# Altium PCB AutoReverseAVR2.PcbDoc
Units mil, origin at the board's own origin, x right, y up, seen from the top; angles counter-clockwise.
Board outline 6000 x 4000 mil, 2 copper layers (Top Layer, Bottom Layer); 57 components, 56 nets, 191 pads, 39 vias.
Unrouted connection lines stored in the file: 8.
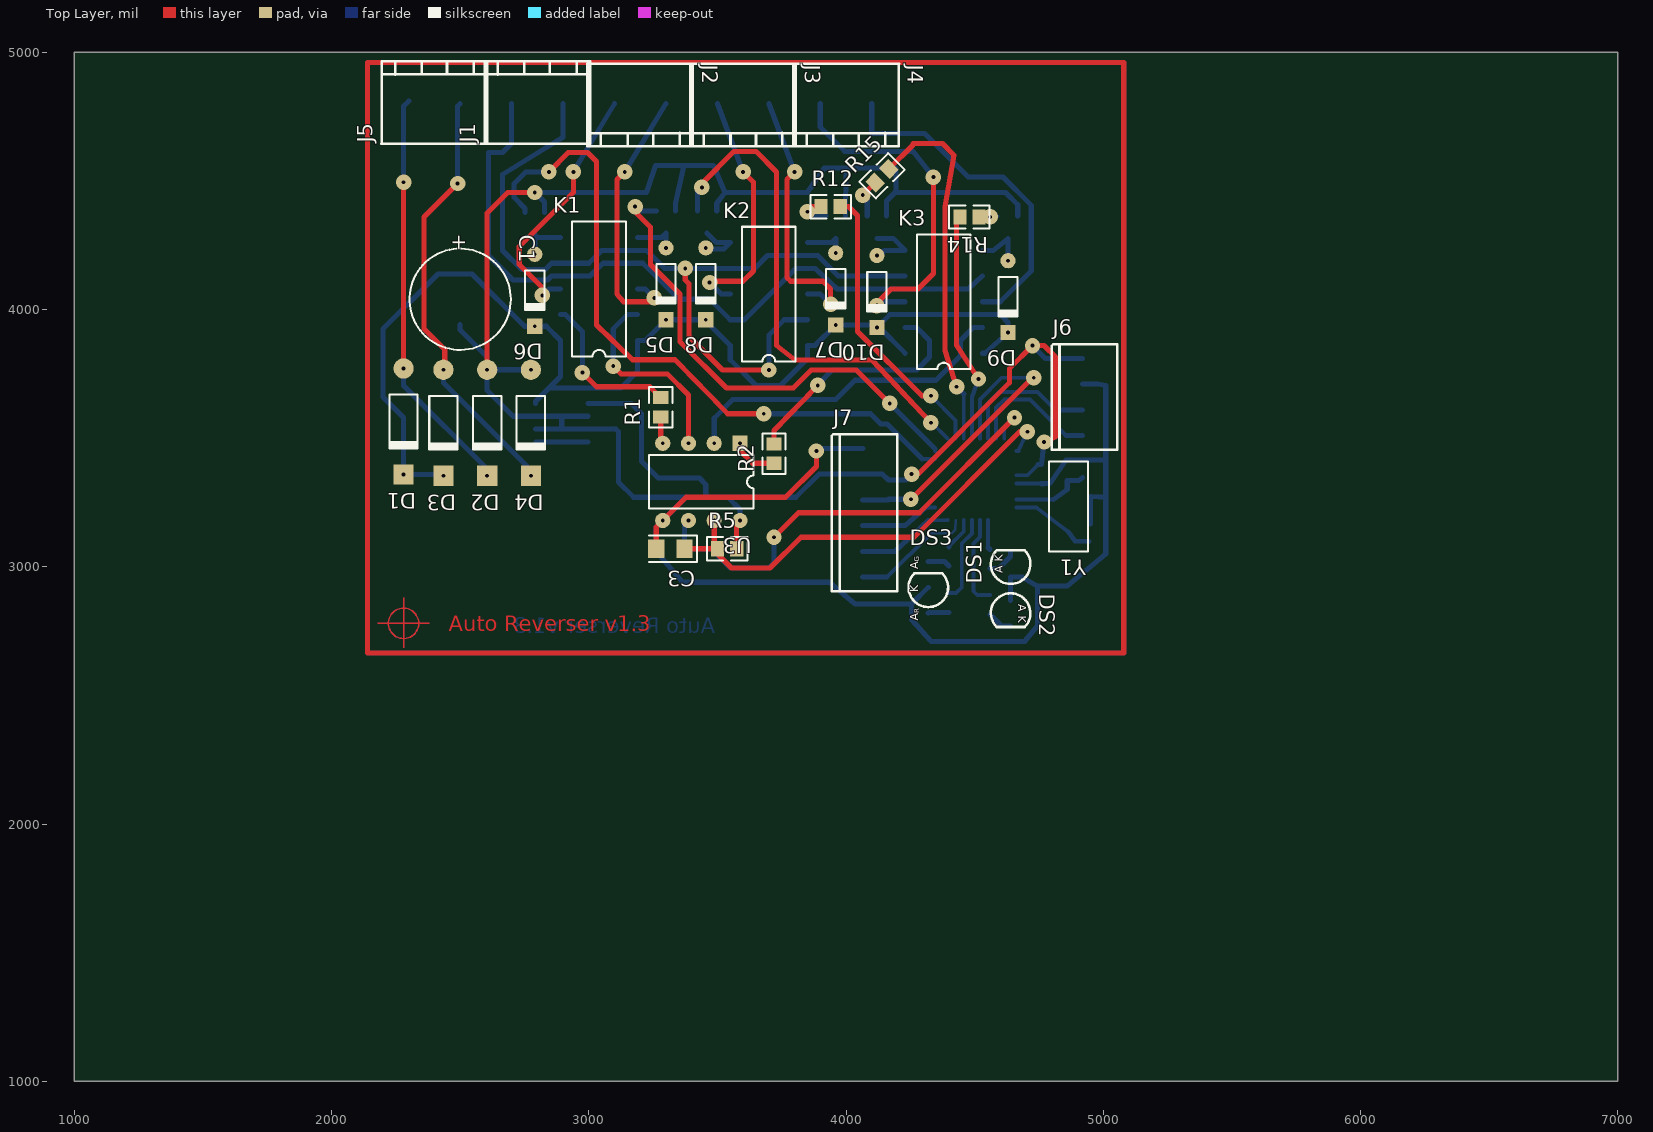
[diagram p0: Top Layer view]
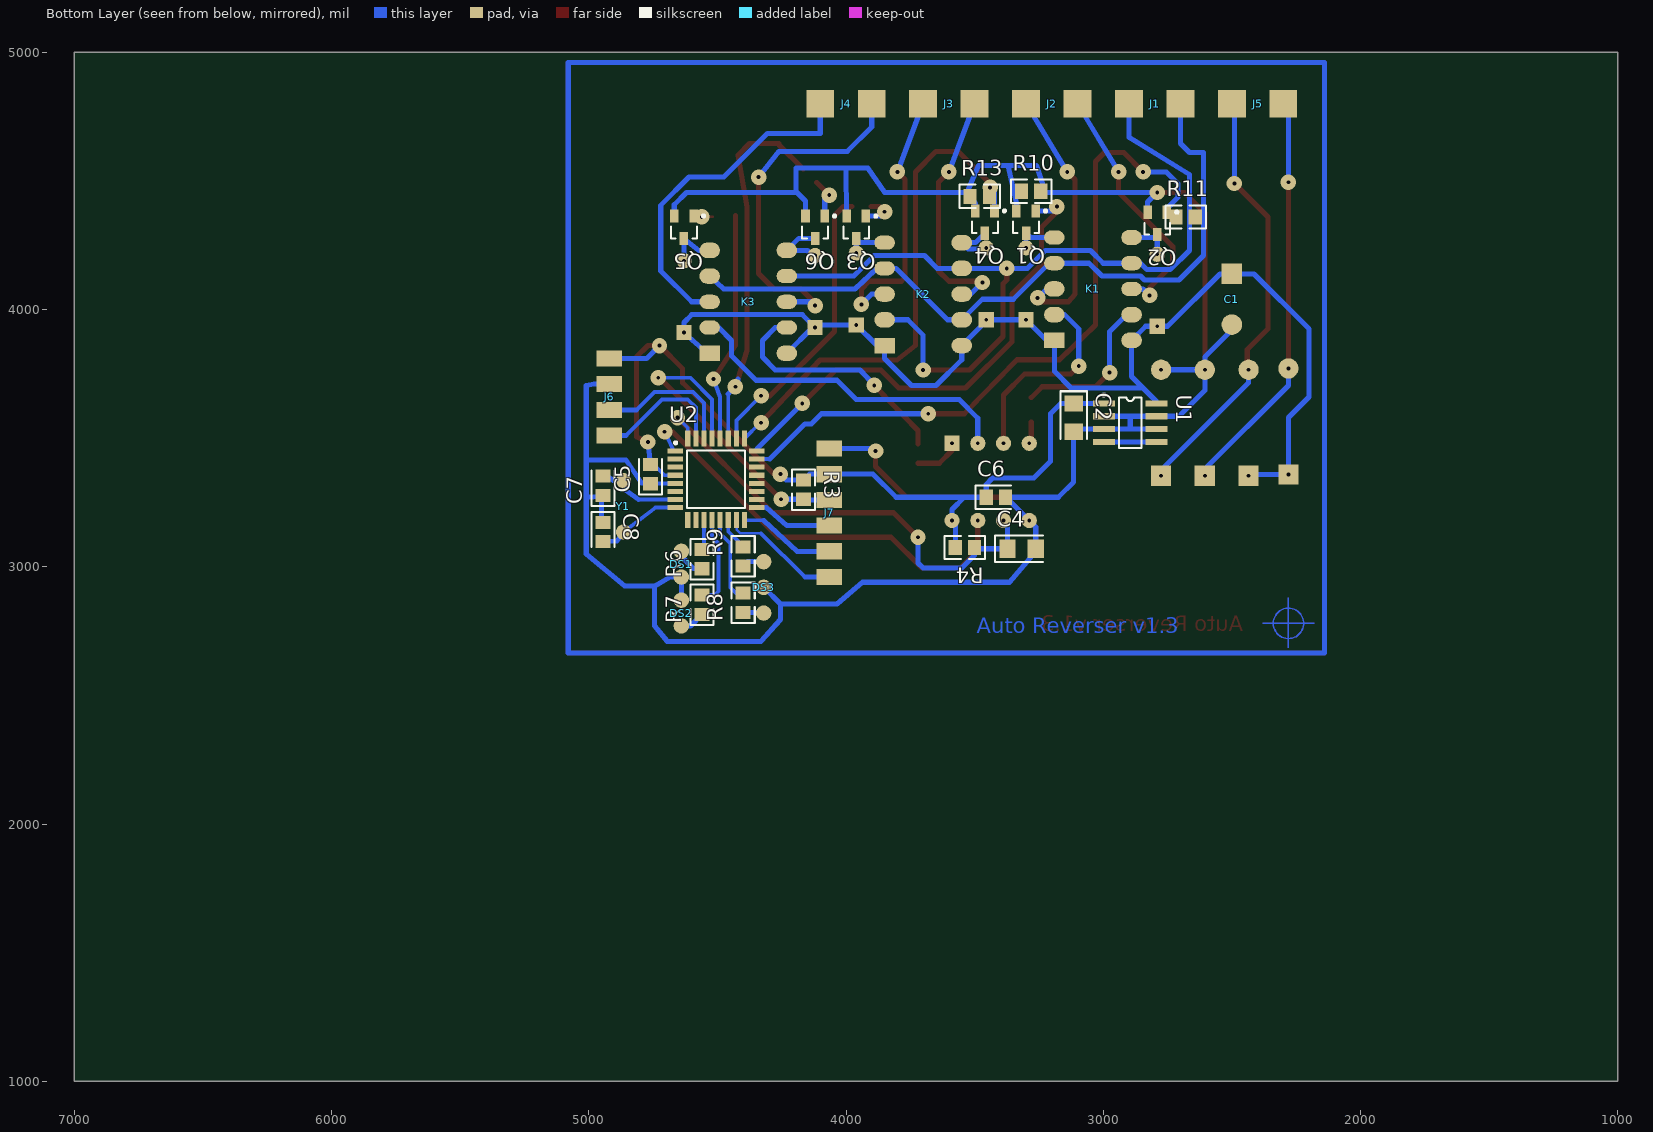
[diagram p1: Bottom Layer view, seen from below]

## Layer stack, top to bottom
Top Layer: signal copper 1.4
Dielectric: dielectric 12.6, FR-4, Dk 4.8
Bottom Layer: signal copper 1.4

## Board outline
1000,1000 7000,1000 7000,5000 1000,5000

## Design rules (kind name [scope] priority, off if disabled: settings)
Clearance [All] p1: gap=12
ComponentClearance [All] p1: gap=10 collisioncheckmode=1
PolygonConnect [All] p1: connectstyle=Relief reliefconductorwidth=10 reliefentries=4 polygonreliefangle="90 Angle"
RoutingLayers [All] p1: top layer=Horizontal bottom layer=Vertical
RoutingVias [All] p1: holewidth=15 width=60 viastyle="Through Hole" minholewidth=15 minwidth=60 maxholewidth=15 maxwidth=60
SolderMaskExpansion [All] p1: expansion=4
TestPointUsage [All] p1: valid=0 allowmultiple=FALSE
Testpoint [All] p1: side=15 testpointundercomponent=TRUE minsize=40 maxsize=100 preferedsize=60 minholesize=0 maxholesize=40 preferedholesize=32 testpointgrid=1 style=1023 order=-539222988
Width [All] p1: maxlimit=50 minlimit=10 preferedwidth=10 toplayer_prefwidth=20 bottomlayer_prefwidth=20 minimp=50.000000 maximp=50.000000 favimp=50.000000
16 further rules are at their usual default settings.

## Components (designator, comment, footprint, x,y, rotation, side; value= is the part's Value field where it differs from the comment)
C1 "Cap Pol1" CAPPR5-10X10.5 2500,4040 r270 top
C2 "10v" CC3216-1206 3115,3580 r270 bottom
C3 "Cap Pol1" CC3216-1206 3317.6,3070 r180 top
C4 "Cap Pol1" CC3216-1206 3317.6,3070 r180 bottom
C5 "Cap" CC2012-0805 4760,3360 r90 bottom
C6 "Cap" CC2012-0805 3417.6,3270 r180 bottom
C7 "Cap" CC2012-0805 4945,3315 r90 bottom
C8 "Cap" CC2012-0805 4945,3135 r270 bottom
D1 "Diode 1N4004" DIO10.46-5.3x2.8 2280,3565 r270 top
D2 "Diode 1N4004" DIO10.46-5.3x2.8 2605,3560 r270 top
D3 "Diode 1N4004" DIO10.46-5.3x2.8 2435,3560 r270 top
D4 "Diode 1N4004" DIO10.46-5.3x2.8 2775,3560 r270 top
D5 "Diode 1N4148" DIO7.1-3.9x1.9 3300,4100 r270 top
D6 "Diode 1N4148" DIO7.1-3.9x1.9 2790,4075 r270 top
D7 "Diode 1N4148" DIO7.1-3.9x1.9 3960,4080 r270 top
D8 "Diode 1N4148" DIO7.1-3.9x1.9 3455,4100 r270 top
D9 "Diode 1N4148" DIO7.1-3.9x1.9 4630,4050 r270 top
D10 "Diode 1N4148" DIO7.1-3.9x1.9 4120,4070 r270 top
DS1 "LED0" LED3mm 4640,2960 r90 top
DS2 "LED0" LED3mm 4640,2870 r270 top
DS3 "LED Tricolour" "LED3mm TriColour" 4320,2920 r90 top
J1 "Main Track" "Screw Terminal 2 way 0.2" 3000,4900 r90 top
J2 "West" "Screw Terminal 2 way 0.2" 3000,4700 r270 top
J3 "Center" "Screw Terminal 2 way 0.2" 3400,4700 r270 top
J4 "East" "Screw Terminal 2 way 0.2" 3800,4700 r270 top
J5 "12V AC" "Screw Terminal 2 way 0.2" 2600,4900 r90 top
J6 "RS232 CONNECTOR" "0.1 SIP 4 PIN" 5020,3610 r0 top
J7 "ISP Connector" "0.1 SIP 6 PIN" 4165,3260 r0 top
K1 "West Relay" DIP-10#1 3040,4080 r90 top
K2 "Reversing Relay" DIP-10#2 3700,4060 r90 top
K3 "East Relay" DIP-10#3 4380,4030 r90 top
Q1 "MMBT100A" SO-G3 3300,4340 r0 bottom
Q2 "MMBT100A" SO-G3 2790,4335 r0 bottom
Q3 "MMBT100A" SO-G3 3960,4320 r0 bottom
Q4 "MMBT100A" SO-G3 3460,4340 r0 bottom
Q5 "MMBT100A" SO-G3 4630,4320 r0 bottom
Q6 "MMBT100A" SO-G3 4120,4320 r0 bottom
R1 "Res2" CR2012-0805 3280,3620 r90 top
R2 "Res2" CR2012-0805 3720,3440 r90 top
R3 "Res2" CR2012-0805 4165,3300 r270 bottom
R4 "Res2" CR2012-0805 3537.6,3075 r0 bottom
R5 "Res2" CR2012-0805 3537.6,3070 r0 top
R6 "Res2" CR2012-0805 4560,3030 r90 bottom
R7 "Res2" CR2012-0805 4560,2852.4 r90 bottom
R8 "Res2" CR2012-0805 4400,2860 r90 bottom
R9 "Res2" CR2012-0805 4400,3040 r90 bottom
R10 "Res2" CR2012-0805 3280,4460 r180 bottom
R11 "Res2" CR2012-0805 2680,4360 r180 bottom
R12 "Res2" CR2012-0805 3940,4400 r0 top
R13 "Res2" CR2012-0805 3480,4440 r180 bottom
R14 "Res2" CR2012-0805 4480,4360 r180 top
R15 "Res2" CR2012-0805 4140,4520 r45 top
U1 "LM78L05ACM" M08A 2895,3560 r270 bottom
U2 "AT90LS4433-4AC" 32A 4505,3340 r180 bottom
U3 "HCPL-2530 Opto Coupler" 8P3 3437.6,3330 r180 top
Y1 "8MHz" RAD-0.2 4865,3235 r270 top
? "" Crosshair 2280,2780 r270 top

## Footprints (in the part's own frame and the unit in brackets; to place one, negate y for a bottom-side part, rotate by r counter-clockwise, add the part's x,y. Pads: shape width x height; smd on the part's side, far side on the other; paste and mask are expansions set on the pad)
"0.1 SIP 4 PIN" [mm] "0.1 SIP 4 PIN"
  rect 2.5x1.6 smd far side: 1(-2.54,5.08) 2(-2.54,2.54) 3(-2.54,0) 4(-2.54,-2.54)
  silkscreen extent -5.59,-3.94 0.89,6.48
"0.1 SIP 6 PIN" [mm] "0.1 SIP 6 PIN"
  rect 2.5x1.6 smd far side: 1(-2.54,5.08) 2(-2.54,2.54) 3(-2.54,0) 4(-2.54,-2.54) 5(-2.54,-5.08) 6(-2.54,-7.62)
  silkscreen extent -5.59,-9.02 0.89,6.48
8P3 [mm] "DIP; 8 Leads; Row Spacing 7.62 mm; Pitch 2.54 mm"
  rect 1.5x1.5 hole 0.381: 1(-3.81,-3.81)
  round 1.5 hole 0.381: 2(-1.27,-3.81) 3(1.27,-3.81) 4(3.81,-3.81) 5(3.81,3.81) 6(1.27,3.81) 7(-1.27,3.81) 8(-3.81,3.81)
  silkscreen extent -5.15,-2.65 5.15,2.65
32A [mm] "QFP; 32 Leads; Body 7 x 7 mm; Pitch 0.8 mm"
  rect 1.55x0.5 smd: 1(-4.025,2.8) 2(-4.025,2) 3(-4.025,1.2) 4(-4.025,0.4) 5(-4.025,-0.4) 6(-4.025,-1.2) 7(-4.025,-2) 8(-4.025,-2.8) 17(4.025,-2.8) 18(4.025,-2) 19(4.025,-1.2) 20(4.025,-0.4) 21(4.025,0.4) 22(4.025,1.2) 23(4.025,2) 24(4.025,2.8)
  rect 0.5x1.55 smd: 9(-2.8,-4.025) 10(-2,-4.025) 11(-1.2,-4.025) 12(-0.4,-4.025) 13(0.4,-4.025) 14(1.2,-4.025) 15(2,-4.025) 16(2.8,-4.025) 25(2.8,4.025) 26(2,4.025) 27(1.2,4.025) 28(0.4,4.025) 29(-0.4,4.025) 30(-1.2,4.025) 31(-2,4.025) 32(-2.8,4.025)
  silkscreen extent -4.13,-2.85 2.85,3.72
CAPPR5-10X10.5 [mil]
  rect 80x80 smd far side: 1(-98.43,0)
  round 80 smd far side: 2(98.43,0)
  silkscreen extent -197,-197 197,197
CC2012-0805 [mm]
  rect 1.3x1.5 smd: 1(-0.95,0) 2(0.95,0)
  silkscreen extent -2,-1.15 1.5,1.15
CC3216-1206 [mm]
  rect 1.6x1.8 smd: 1(-1.4,0) 2(1.4,0)
  silkscreen extent -2.6,-1.3 2.1,1.3
CR2012-0805 [mm]
  rect 1.3x1.5 smd: 1(-0.95,0) 2(0.95,0)
  silkscreen extent -2,-1.15 2,1.15
Crosshair [mil] "Mounting Hole pad"
  Multi-Layer circle w5: c0,0 r59.06
  Multi-Layer lines w5: 0,-100 0,100 ; 95,0 -100,0
DIO7.1-3.9x1.9 [mm]
  round 1.5 hole 0.381: 1(-3.55,0)
  rect 1.5x1.5 hole 0.381: 2(3.55,0)
  silkscreen extent -1.95,-0.95 2.05,0.95
DIO10.46-5.3x2.8 [mm]
  round 2 hole 0.381: 1(-5.23,0)
  rect 2x2 hole 0.381: 2(5.23,0)
  silkscreen extent -2.65,-1.4 2.75,1.4
DIP-10#1 [mil]
  rect 60x80 smd far side: 1(-200,-150)
  oval 60x80 smd far side: 2(-100,-150) 3(0,-150) 6(200,150) 9(-100,150) 10(-200,150)
  oval 55x80 smd far side: 4(100,-150) 5(200,-150) 7(100,150) 8(0,150)
  silkscreen extent -262,-104 262,104
DIP-10#2 [mil]
  rect 60x80 smd far side: 1(-200,-150)
  oval 60x80 smd far side: 2(-100,-150) 3(0,-150) 6(200,150) 7(100,150) 8(0,150) 9(-100,150) 10(-200,150)
  oval 55x80 smd far side: 4(100,-150) 5(200,-150)
  silkscreen extent -262,-104 262,104
DIP-10#3 [mil]
  rect 60x80 smd far side: 1(-200,-150)
  oval 55x80 smd far side: 2(-100,-150) 3(0,-150) 7(100,150) 8(0,150) 9(-100,150)
  oval 60x80 smd far side: 4(100,-150) 5(200,-150) 6(200,150) 10(-200,150)
  silkscreen extent -262,-104 262,104
LED3mm [mil] "LED 3mm Through Hole"
  round 60 smd far side: 1(100,0) 2(0,0)
  silkscreen extent -27,-77 104,77
"LED3mm TriColour" [mil]
  round 60 smd far side: 1(100,0) 2(0,0) 3(-100,0)
  silkscreen extent -77,-77 54,77
M08A [mm] "Small Outline; 8 Leads; Body Width 3.9 mm; Pitch 1.27 mm"
  rect 0.6x2.2 smd: 1(-1.905,-2.6) 2(-0.635,-2.6) 3(0.635,-2.6) 4(1.905,-2.6) 5(1.905,2.6) 6(0.635,2.6) 7(-0.635,2.6) 8(-1.905,2.6)
  silkscreen extent -2.88,-2.72 2.5,1.1
RAD-0.2 [mil]
  round 60 smd far side: 1(-100,0) 2(100,0)
  silkscreen extent -175,-75 175,75
"Screw Terminal 2 way 0.2" [mm]
  rect 2.75x2.75 smd far side: 1(-2.54,7.62) 2(-2.54,2.54)
  silkscreen extent -6.5,-0.15 1.65,10.31
SO-G3 [mm]
  rect 0.85x1.3 smd: 1(-0.95,-1.1) 2(0.95,-1.1) 3(0,1.1)
  silkscreen extent -2.05,-1.22 1.28,1.1

## Part data
C1 C3 C4: "Polarized Capacitor (Radial)"
C2: library part "Cap Pol1", "Polarized Capacitor (Radial)"
C5 C6 C7 C8: "Capacitor"
D1 D2 D3 D4: "1 Amp General Purpose Rectifier"
D5 D6 D7 D8 D9 D10: "High Conductance Fast Diode"
DS1 DS2: "Typical INFRARED GaAs LED"
DS3: "Typical Red Green Tri Color LED"
J1 J2 J3 J4 J5: library part "Screw Terminal 2 Way"
K1 K2 K3: library part "EA2-5T Dual Coil 5V Latching Relay", "EA2-5T Dual Coil 5V Latching Relay"
Q1 Q2 Q3 Q4 Q5 Q6: library part UN2212, "Bias Resistor Transistor"
R1 R2 R3 R4 R5 R6 R7 R8 R9 R10 R11 R12 R13 R14 R15: "Resistor"
U1: "3-Terminal Positive Regulator"
U2: "8-Bit AVR Microcontroller with 4K Bytes of In-System Programmable Flash Memory"
U3: library part HCPL-2530
Y1: library part XTAL, "Crystal Oscillator"

## Via types
v1: diameter 60, hole 15, Top Layer to Bottom Layer, 39 vias

## Nets (pads, with @x,y where several pads share a name; then routed paths per layer and width w, separated by ;. In a path a pad name is that pad's centre, name@x,y a point inside that pad or via, vN(x,y) a via of type N, cw(c..) or ccw(c..) an arc to the next point about the centre after c; other vN are vias at no path point)
A: J1.2 K1.7 K2.2 K2.7 K3.7 | length 3356
  Top Layer w20: v1(3375,4160) 3375,4115 3390,4100 3390,3895 3520,3765 v1(3700,3765)
  Bottom Layer w20: J1.2 2900,4670 2665,4525 2665,4230 2740,4155 2830,4155 2855,4180 3000,4180 3050,4230 3225,4230 3295,4160 3645,4160 3695,4210 3890,4210 3970,4130 K3.7 ; v1(3700,3765) 3700,3900 3760,3960 K2.2
B: J1.1 K1.4 K2.4 K2.9 K3.4 | length 2870.8
  Bottom Layer w20: J1.1 2700,4645 2665,4610 2610,4610 2610,4210 2705,4115 2840,4115 2855,4130 3005,4130 3055,4180 3210,4180 3350,4040 3470,4040 K2.9 3605,3960 3805,4160 3880,4160 3965,4080 4475,4080 K3.4
GND: C1.2 C2.2 C3.2 C4.2 C5.1 C6.2 C7.1 C8.1 D2.1 D4.1 DS1.2 DS2.2 DS3.2 J6.2 J7.1 Q1.2 Q2.2 Q3.2 Q4.2 Q5.2 Q6.2 U1.2 U1.3 U1.6 U1.7 U2.5 U2.21 U3.5 | length 10597.2
  Top Layer w20: D2.1 2605,4375 2685,4455 v1(2790,4455) ; C3.2 3262.48,3154.88 3377.6,3270 3765,3270 3885,3390 v1(3885,3450)
  Bottom Layer w15: U2.5 C5.1@4758.35,3324.25
  Bottom Layer w20: C1.2 2500,3920 2605,3815 2605,3685 2705,3585 U1.2 ; D2.1 D4.1 ; U1.6 3104.88,3535 C2.2 3115,3330 3175,3270 C6.2 3377.6,3270 3262.48,3154.88 3262.48,3057.52 3365,2940 3935,2940 4035,2855 4255,2855 ; Q2.2 2827.4,4417.6 v1(2790,4455) 3225,4455 3260,4560 3485,4560 3530,4455 ; 2895,3535 2895,3585 ; Q1.2 3337.4,4412.4 3370,4560 ; Q4.2 3497.4,4412.6 3530,4455 ; v1(3885,3450) 3895,3460 J7.1 ; Q3.2 4000,4550 ; Q6.2 4157.4,4422.4 4190,4455 4620,4455 4667.4,4407.6 Q5.2 ; 4157.4,4422.6 4195,4460 4195,4550 3915,4550 3850,4455 3530,4455 ; DS3.2 4255,2855 ; DS2.2 DS1.2 4685,2960 4745,2925 ; C5.1@4758.35,3324.25 C5.1 4767.6,3322.6 4795,3325 4855,3415 4970,3415 5010,3415 ; J6.2 4980,3710 5010,3705 5010,3050 4860,2925 4745,2925 ; C8.1@4950,3167.4 4950,3272.6 5010,3270 ; 4255,2855 4255,2795 4330,2710 4695,2710 4745,2770 4745,2925
NetC3_1: C3.1 R5.1 U2.1 U3.7 | length 1799.2
  Top Layer w20: C3.1 R5.1 3500.2,3049.8 3555,2995 3705,2995 3825,3115 4265,3115 4675,3525 v1(4705,3525) ; R5.1@3475,3070 3487.6,3082.6 U3.7
  Bottom Layer w15: U2.1 4670.24,3450.24 v1(4705,3525)
NetC4_1: C4.1 R4.1 U2.32 U3.6 | length 1850.2
  Top Layer w20: v1(3720,3115) 3815,3210 4285,3210 v1(4655,3580)
  Bottom Layer w15: U2.32 4615.24,3540.24 v1(4655,3580)
  Bottom Layer w20: U3.6 3372.72,3165.12 C4.1 3495.2,3070 R4.1 3500.2,3044.8 3550,2995 3700,2995 3720,3015 v1(3720,3115)
NetC7_2: C7.2 U2.7 Y1.1 | length 308.5
  Bottom Layer w15: U2.7 4806.26,3261.26
  Bottom Layer w20: 4806.26,3261.26 4860,3300 4860,3335 4905,3335 C7.2@4920,3347.4
NetC8_2: C8.2 U2.8 Y1.2 | length 331.5
  Bottom Layer w15: U2.8 4740.24,3229.76 Y1.2
  Bottom Layer w20: Y1.2 4890,3100 C8.2
NetD1_1: D1.1 D2.2 J5.1 | length 1572.9
  Top Layer w20: D1.1 v1(2280,4495)
  Bottom Layer w20: D1.1 2280,3705 D2.2@2605,3380 ; v1(2280,4495) 2280,4790 J5.1@2300,4810
NetD3_1: D3.1 D4.2 J5.2 | length 1652.9
  Top Layer w20: D3.1@2440,3770 2440,3845 2360,3925 2360,4360 v1(2490,4490)
  Bottom Layer w20: D3.1 2435,3715 D4.2@2775,3375 ; v1(2490,4490) 2490,4790 J5.2
NetD5_1: D5.1 K1.5 Q1.3 | length 173.8
  Bottom Layer w20: K1.5 3283.31,4280 Q1.3 D5.1
NetD6_1: D6.1 K1.6 Q2.3 | length 181.8
  Bottom Layer w20: D6.1 Q2.3 2801.69,4280 K1.6
NetD7_1: D7.1 K2.5 Q3.3 | length 173.8
  Bottom Layer w20: K2.5 3943.31,4260 Q3.3 D7.1
NetD8_1: D8.1 K2.6 Q4.3 | length 200.7
  Bottom Layer w20: Q4.3 3496.69,4260 K2.6 3524.76,4234.76 D8.1@3465,4234.76
NetD9_1: D9.1 K3.5 Q5.3 | length 203.7
  Bottom Layer w20: K3.5 4573.31,4230 Q5.3 D9.1
NetD10_1: D10.1 K3.6 Q6.3 | length 237.6
  Bottom Layer w20: Q6.3 4183.31,4276.69 K3.6 4150,4230 D10.1@4130,4210
NetDS1_1: DS1.1 R6.1 | length 119.6
  Bottom Layer w20: R6.1 4592.6,2992.6 4640,3040 DS1.1
NetDS2_1: DS2.1 R7.1 | length 98.6
  Bottom Layer w20: R7.1 4605,2770 DS2.1
NetDS3_1: DS3.1 R9.1 | length 87.2
  Bottom Layer w20: DS3.1 4382.6,3020 R9.1
NetDS3_3: DS3.3 R8.1 | length 81.1
  Bottom Layer w20: DS3.3 4322.6,2822.6 R8.1
NetJ2_1: J2.1 K1.3 | length 1043.6
  Top Layer w20: v1(3140,4535) 3110,4505 3110,4060 3135,4030 3245,4030 v1(3255,4045)
  Bottom Layer w20: v1(3140,4535) J2.1 ; K1.3 3220,4080 v1(3255,4045)
NetJ2_2: J2.2 K1.8 | length 994.2
  Top Layer w20: v1(2820,4055) 2820,4085 2730,4175 2730,4245 2940,4455 v1(2940,4535)
  Bottom Layer w20: v1(2820,4055) 2845,4080 K1.8 ; v1(2940,4535) J2.2
NetJ3_1: J3.1 K2.3 | length 1060.9
  Top Layer w20: v1(3800,4535) 3770,4505 3770,4125 3785,4110 3910,4110 3940,4080 v1(3940,4020)
  Bottom Layer w20: J3.1 v1(3800,4535) ; K2.3 3900,4060 v1(3940,4020)
NetJ3_2: J3.2 K2.8 | length 972.1
  Top Layer w20: v1(3470,4105) 3475,4110 3600,4110 3640,4150 3640,4495 v1(3600,4535)
  Bottom Layer w20: v1(3470,4105) 3515,4060 K2.8 ; J3.2 v1(3600,4535)
NetJ4_1: J4.1 K3.3 | length 1345.7
  Bottom Layer w20: J4.1 4100,4685 4305,4685 4475,4515 4610,4515 4720,4405 4720,4150 4600,4030 K3.3
NetJ4_2: J4.2 K3.8 | length 1386.3
  Top Layer w20: v1(4120,4015) 4120,4025 4175,4080 4280,4080 4340,4140 v1(4340,4515)
  Bottom Layer w20: J4.2 3900,4710 3995,4615 4260,4615 v1(4340,4515) ; v1(4120,4015) 4135,4030 K3.8
NetJ6_3: J6.3 U2.30 | length 553.2
  Bottom Layer w15: U2.30 4552.24,3637.24 4595,3680 4745,3680 4815,3610
  Bottom Layer w20: 4815,3610 J6.3
NetJ6_4: J6.4 U2.31 | length 527.5
  Bottom Layer w15: U2.31 4583.74,3618.74 4615,3650 4715,3650 4855,3510
  Bottom Layer w20: 4855,3510 J6.4
NetJ7_3: J7.3 R3.2 U2.29 | length 1258.2
  Top Layer w20: v1(4252.4,3262.6) 4724.8,3735 v1(4730,3735)
  Bottom Layer w15: U2.29 4520.75,3650.75 4605,3735 v1(4730,3735)
  Bottom Layer w20: J7.3 4162.4,3260 R3.2 v1(4252.4,3262.6)
NetJ7_4: J7.4 U2.17 | length 307.8
  Bottom Layer w15: 4310,3230 U2.17
  Bottom Layer w20: J7.4 4230,3160 4310,3230
NetJ7_5: J7.5 U2.16 | length 376.7
  Bottom Layer w15: 4320,3180 U2.16
  Bottom Layer w20: J7.5 4190,3060 4320,3180
NetJ7_6: J7.6 U2.15 | length 473.2
  Bottom Layer w10: 4330,3130 4410,3130 4425,3145 U2.15
  Bottom Layer w15: 4160,2960 4330,3130
  Bottom Layer w20: J7.6 4160,2960
NetK1_2: K1.2 U3.3 | length 789.4
  Top Layer w20: v1(3095,3780) 3125,3750 3305,3750 3387.6,3667.4 U3.3
  Bottom Layer w20: v1(3095,3780) 3095,3925 3150,3980 K1.2
NetK1_9: K1.9 R1.2 | length 617.4
  Top Layer w20: v1(2975,3755) 3030,3700 3237.4,3700 R1.2
  Bottom Layer w20: K1.9 2910,3980 2975,3915 v1(2975,3755)
NetK3_2: K3.2 U3.2 | length 1321.1
  Bottom Layer w20: U3.2 3487.6,3577.6 3560,3650 3960,3650 4035,3725 4350,3725 4445,3820 4445,3880 4495,3930 K3.2
NetK3_9: K3.9 R2.2 | length 959.4
  Top Layer w20: R2.2 3720,3530 v1(3890,3705)
  Bottom Layer w20: v1(3890,3705) 3945,3765 4275,3765 4325,3815 4325,3880 4275,3930 K3.9
NetQ1_1: Q1.1 R10.1 | length 1917.3
  Top Layer w20: v1(3180,4400) 3180,4380 3240,4320 3240,4175 3355,4060 3355,3875 3535,3695 3795,3695 3865,3765 4040,3765 v1(4170,3635)
  Bottom Layer w15: 4346.54,3450.24 4346.54,3458.46
  Bottom Layer w20: v1(3180,4400) 3196.69,4383.31 Q1.1 ; v1(4170,3635) 4346.54,3458.46
NetQ2_1: Q2.1 R11.1 | length 2681
  Top Layer w20: v1(2845,4535) 2920,4610 2995,4610 3030,4575 3030,3940 3170,3805 3335,3805 3540,3595 v1(3680,3595)
  Bottom Layer w15: 4296.26,3418.74 4346.54,3418.74
  Bottom Layer w20: Q2.1 2752.6,4392.4 2710,4435 2710,4490 2755,4535 v1(2845,4535) ; v1(3680,3595) 4095,3595 4135,3555 4160,3555 4296.26,3418.74
NetQ3_1: Q3.1 R12.1 | length 140.4
  Top Layer w20: v1(3850,4380) 3870,4400 R12.1
  Bottom Layer w20: v1(3850,4380) 3866.69,4363.31 Q3.1
NetQ4_1: Q4.1 R13.1 | length 1979.1
  Top Layer w20: v1(3440,4475) 3440,4490 3565,4615 3650,4615 3730,4535 3730,3860 3801.53,3803.47 4101.53,3803.47 v1(4330,3560)
  Bottom Layer w15: v1@4333.23,3560 4394.76,3498.46
  Bottom Layer w20: Q4.1 3422.6,4457.6 v1(3440,4475) ; v1(4330,3560) v1@4333.23,3560
NetQ5_1: Q5.1 R14.1 | length 201.6
  Top Layer w10: R14.1 v1(4560,4360)
  Bottom Layer w10: v1(4560,4360) 4563.31,4363.31 Q5.1
  Bottom Layer w15: 4489.25,3498.46 4489.25,3623.46
NetQ6_1: Q6.1 R15.1 | length 157.6
  Top Layer w20: v1(4065,4445) R15.1
  Bottom Layer w20: v1(4065,4445) 4082.6,4427.4 Q6.1
NetR1_1: R1.1 U3.4 | length 85.7
  Top Layer w20: R1.1@3280,3562.6 3280,3487.6 U3.4
NetR2_1: R2.1 U3.1 | length 180.6
  Top Layer w20: U3.1 3587.6,3452.4 3637.4,3402.6 R2.1
NetR6_2: R6.2 U2.11 | length 117.3
  Bottom Layer w15: R6.2@4552.24,3075.16 U2.11
  Bottom Layer w20: R6.2@4552.24,3075.16 R6.2
NetR7_2: R7.2 U2.12 | length 358.5
  Bottom Layer w15: U2.12 4520.75,3115.75 4495,3090 4495,2905 4510.2,2889.8 R7.2
NetR8_2: R8.2 U2.13 | length 337.2
  Bottom Layer w15: R8.2 4427.4,2897.4 4450,2920 4450,3090 4489.25,3129.25 U2.13
NetR9_2: R9.2 U2.14 | length 128.1
  Bottom Layer w15: R9.2@4400,3080 4457.76,3137.76 U2.14
  Bottom Layer w20: R9.2 R9.2@4400,3080
NetR10_2: R10.2 U2.24
NetR11_2: R11.2 U2.23
NetR12_2: R12.2 U2.26 | length 1127.1
  Top Layer w20: R12.2 4010,4400 4045,4365 4045,3915 4295,3665 v1(4330,3665)
  Bottom Layer w15: v1(4330,3665) 4426.26,3568.74 U2.26
NetR13_2: R13.2 U2.25
NetR14_2: R14.2 U2.28 | length 896.2
  Top Layer w20: R14.2@4430,4365 4430,4320 4430,3860 v1(4515,3730)
  Bottom Layer w15: U2.28 4490,3660 v1(4515,3730)
NetR15_2: R15.2 U2.27 | length 1441.6
  Top Layer w20: R15.2 4260,4640 4260,4645 4375,4645 4420,4600 4385,4400 4385,3840 4420,3730
  Bottom Layer w15: U2.27 4457.76,3672.24
  Bottom Layer w20: 4420,3730 4420,3710 4457.76,3672.24
  other v1: 4429.93,3700.07
NetU1_4: U1.4 U1.5 | length 202.4
  Bottom Layer w20: U1.5@2795,3485 U1.4
VCC: C2.1 C5.2 C6.1 J6.1 J7.2 R3.1 R4.2 R5.2 U1.1 U2.4 U2.18 U3.8 | length 3522.7
  Top Layer w20: R5.2 3575,3167.4 U3.8 ; v1(4255,3360) 4280,3360 4635,3715 4635,3770 v1(4725,3860) 4770,3860 4815,3815 4815,3505 v1(4770,3485)
  Bottom Layer w15: U2.4 4705.75,3355.75 C5.2@4747.4,3397.4
  Bottom Layer w20: U1.1 3165,3635 3205,3595 3205,3410 3270,3345 3430,3345 3455,3320 C6.1 ; C2.1@3114.88,3635 C2.1 ; C6.1@3465,3270 3805,3270 3895,3360 J7.2 4142.4,3360 R3.1 4232.4,3337.4 v1(4255,3360) ; 3540,3270 3587.6,3222.4 U3.8 3575,3167.4 R4.2 ; v1(4725,3860) 4775,3810 J6.1 ; C5.2@4747.4,3397.4 C5.2 v1(4770,3485)
VDD: C1.1 D1.2 D3.2 D5.2 D6.2 D7.2 D8.2 D9.2 D10.2 K1.1 K1.10 K2.1 K2.10 K3.1 K3.10 U1.8 | length 4515.8
  Bottom Layer w20: D3.2 2430,3359.09 D1.2 2280,3580 2200,3660 2200,3925 2413.43,4138.43 2546.57,4138.43 2749.76,3935.24 2834.76,3935.24 K1.10 2890,3740 2792.64,3642.64 U1.8 ; 2850,3695 3125,3695 3190,3760 K1.1 3219.76,3880 D5.2 D8.2 3465,3955.24 3465,3945 K2.10 3550,3805 3650,3705 3745,3705 3850,3810 K2.1 3879.76,3860 D7.2 4110,3940.24 D10.2 ; K3.10 4129.76,3930.24 D10.2 ; K3.1 4539.76,3830 D9.2 4630,3950 4600,3980 4169.76,3980 D10.2
pads on no net: U2.2 U2.3 U2.6 U2.9 U2.10 U2.19 U2.20 U2.22

## Other copper
Top Layer:
  text "Auto Reverser v1.3" at 2455,2750 h60
Bottom Layer:
  text "Auto Reverser v1.3" at 3492.67,2742 h60
Multi-Layer:
  lines w20: 2140,2665 5080,2665 5080,4960 2140,4960 2140,2665

## Text inside footprints (layer, text, board x,y; h text height)
C1: Top Overlay "+" at 2470.47,4294.92 h59.06 r270
DS1: Top Overlay "K" at 4610,3020 h31.5 r90; Top Overlay "A" at 4610,2975 h31.5 r90
DS2: Top Overlay "K" at 4670,2810 h31.5 r270; Top Overlay "A" at 4670,2855 h31.5 r270
DS3: Top Overlay "A" at 4280,2790 h31.5 r90; Top Overlay "K" at 4280,2900 h31.5 r90; Top Overlay "G" at 4285,3020 h20.37 r90; Top Overlay "R" at 4285,2820 h20.37 r90; Top Overlay "A" at 4280,2990 h31.5 r90